# Altium PCB sensor_good.PcbDoc (part 2 of 3)
Units mil, origin at the board's own origin, x right, y up, seen from the top; angles counter-clockwise.
Board outline 3543.31 x 2755.91 mil, 6 copper layers (TOP, GND1, Sig1, Sig2, GND2, BOT), stack 32.112 mil thick; 126 components, 166 nets, 710 pads, 273 vias.
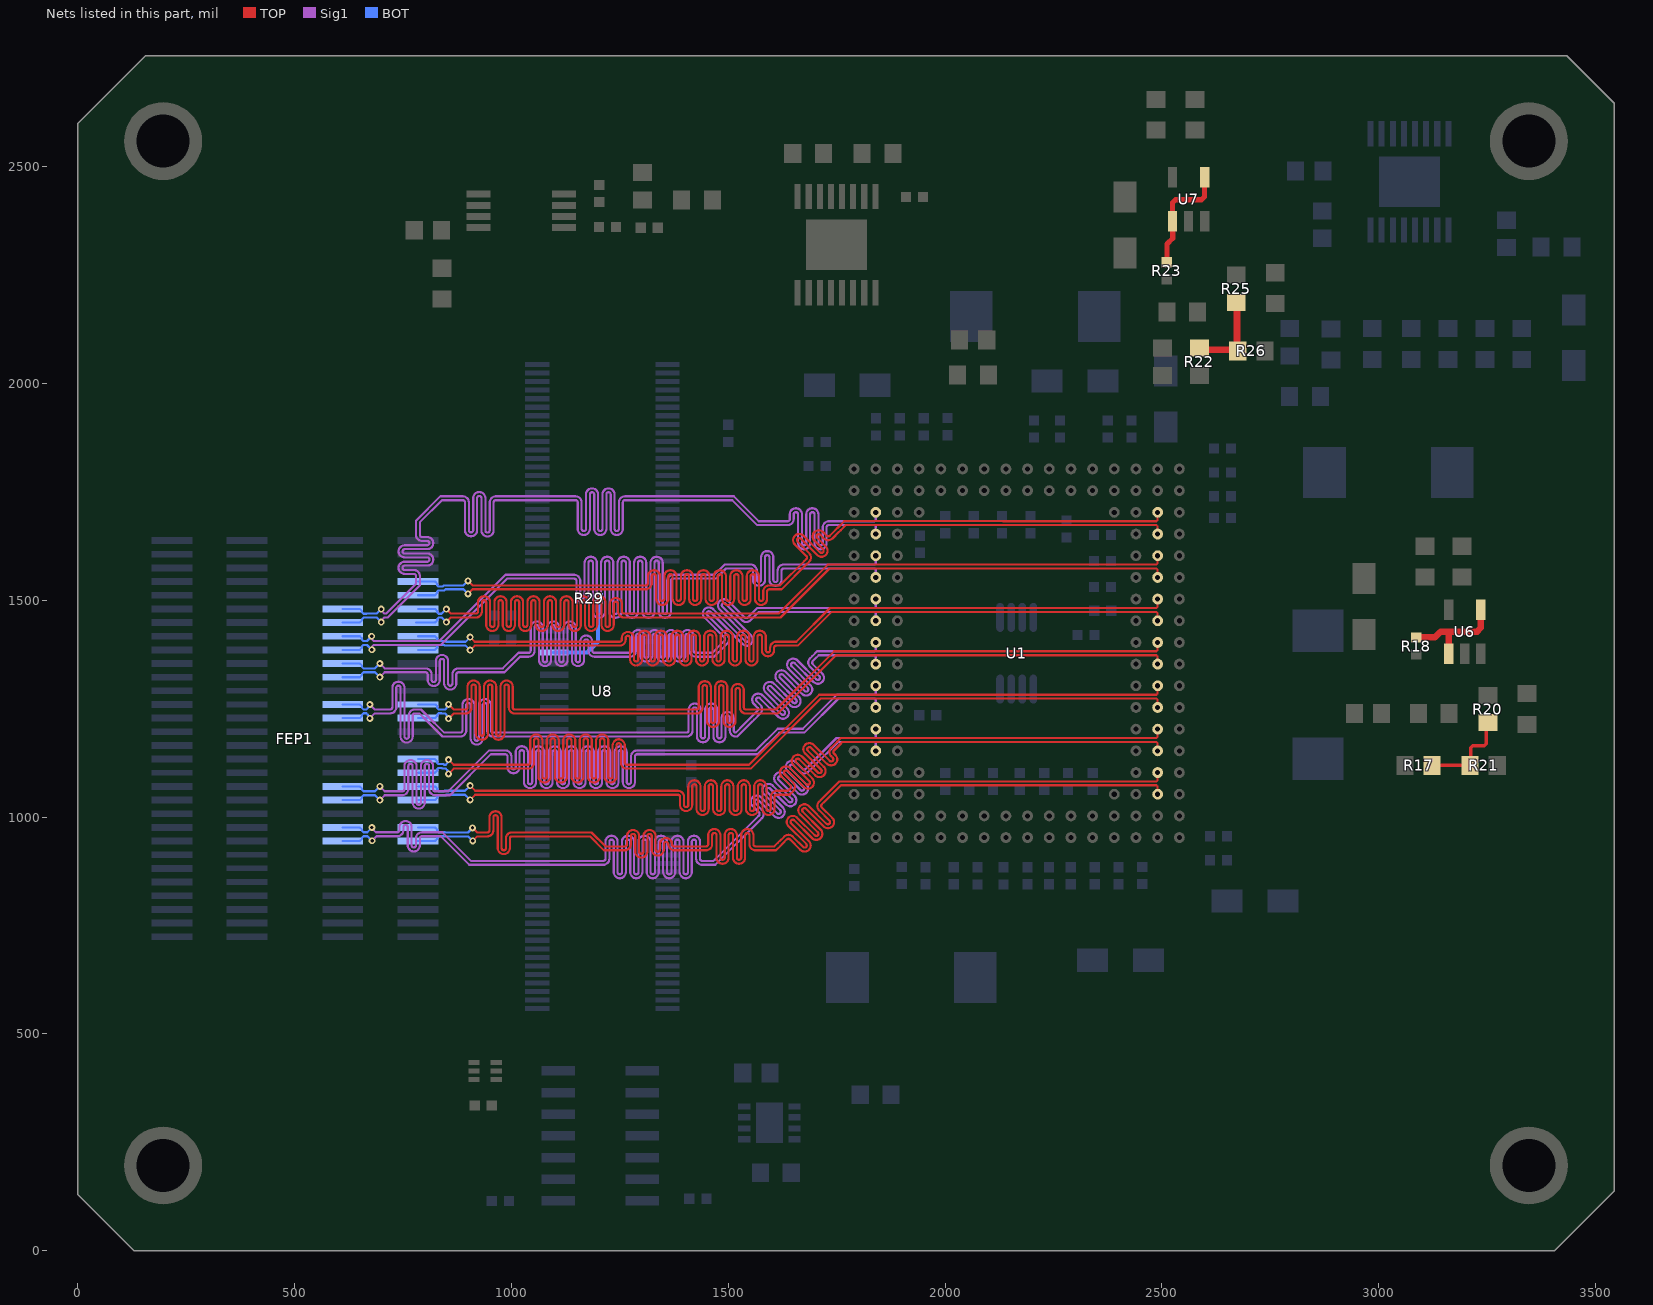
[diagram p6: the nets of this part, all layers, seen from the top]

## Via types
v1: diameter 16, hole 8, TOP to BOT, 215 vias
v2: diameter 20, hole 10, TOP to BOT, 40 vias
v3: diameter 30, hole 15, TOP to BOT, 8 vias
v4: diameter 50, hole 25, TOP to BOT, 5 vias
v5: diameter 19.7, hole 7.99, TOP to BOT, 2 vias
v6: diameter 19.7, hole 8, TOP to BOT, 2 vias
v7: diameter 22, hole 12, TOP to BOT, 1 vias

## Nets (pads, with @x,y where several pads share a name; then routed paths per layer and width w, separated by ;. In a path a pad name is that pad's centre, name@x,y a point inside that pad or via, vN(x,y) a via of type N, cw(c..) or ccw(c..) an arc to the next point about the centre after c; other vN are vias at no path point) (continued)
NetR17_1: R17.1 R20.1 R21.2 | length 218.6
  TOP w8: R17.1@3123.38,1119.37 R21.2@3210.39,1119.37 3211.89,1120.87 3211.89,1160.31 3216.58,1165 3243.73,1165 3248.41,1169.69 3248.41,1214.4 R20.1@3251.89,1217.88
NetR18_1: R18.1 U6.1 U6.4 | length 251.3
  TOP w15: R18.1@3086.89,1414.37 3129.28,1414.37 3142.67,1427.75 3161.89,1427.75 ; U6.1@3161.67,1376.75 3161.67,1427.53 3161.89,1427.75 ; U6.4@3235.67,1478.75 3235.67,1436.54 3226.88,1427.75 3161.89,1427.75
NetR22_1: R22.1 R25.1 R26.2 | length 202.2
  TOP w15: R22.1@2586.55,2081.49 2589.8,2078.25 2671.81,2078.25 R26.2@2673.3,2076.75 ; R25.1@2671.55,2187.01 2673.3,2185.26 R26.2@2673.3,2076.75 ; R26.2@2675.06,2075 R26.2@2673.3,2076.75
NetR23_1: R23.1 U7.1 U7.4 | length 267.8
  TOP w12: R23.1@2511.55,2279.69 2511.55,2321.55 2525,2335 2525,2373.55 U7.1@2524.55,2374 2524.55,2416.79 2531.58,2423.82 2591.52,2423.82 2598.55,2430.85 U7.4@2598.55,2476
NetR29_1: R29.1 U8.22 | length 211.4
  BOT w10: U8.22@1099,1379.57 1174.57,1379.57 1199.69,1404.69 R29.1@1199.69,1505
OUT0_BOT_N: FEP1.A26 U1.R15 | length 2848.3
  TOP w5: v1(900,1515) 910.5,1525.5 1302.81,1525.5 1309.81,1525.5 ccw(c1309.81,1539.5) 1323.81,1539.5 1323.81,1555.5 cw(c1328.81,1555.5) 1333.81,1555.5 1333.81,1503.5 ccw(c1347.81,1503.5) 1361.81,1503.5 1361.81,1555.5 cw(c1366.81,1555.5) 1371.81,1555.5 1371.81,1503.5 ccw(c1385.81,1503.5) 1399.81,1503.5 1399.81,1555.5 cw(c1404.81,1555.5) 1409.81,1555.5 1409.81,1503.5 ccw(c1423.81,1503.5) 1437.81,1503.5 1437.81,1555.5 cw(c1442.81,1555.5) 1447.81,1555.5 1447.81,1503.5 ccw(c1461.81,1503.5) 1475.81,1503.5 1475.81,1555.5 cw(c1480.81,1555.5) 1485.81,1555.5 1485.81,1503.5 ccw(c1499.81,1503.5) 1513.81,1503.5 1513.81,1555.5 cw(c1518.81,1555.5) 1523.81,1555.5 1523.81,1503.5 ccw(c1537.81,1503.5) 1551.81,1503.5 1551.81,1555.5 cw(c1556.81,1555.5) 1561.81,1555.5 1561.81,1503.5 ccw(c1575.81,1503.5) 1589.81,1503.5 1589.81,1520.5 cw(c1594.81,1520.5) 1594.81,1525.5 1613,1525.5 1623.23,1525.5 1681.76,1584.03 1686.68,1588.95 ccw(c1676.81,1598.88) 1686.68,1608.8 1660.09,1635.39 cw(c1663.64,1638.92) 1660.08,1642.43 ; 1660.12,1642.47 cw(c1663.64,1638.92) 1667.17,1642.45 ; 1667.2,1642.43 1705.08,1604.55 ccw(c1715.01,1614.41) 1724.91,1604.51 ccw(c1715.01,1614.41) 1724.89,1624.33 1705.22,1644 ; 1705.2,1644.02 cw(c1708.73,1647.56) 1705.18,1651.08 ; 1705.22,1651.12 cw(c1708.73,1647.56) 1712.27,1651.1 ; 1712.29,1651.07 1720.62,1642.75 ccw(c1730.55,1652.62) 1740.47,1642.74 1754.44,1656.71 ; 1754.47,1656.74 1759.4,1661.67 1771.36,1673.64 2129.68,1673.64 2129.86,1673.45 2487.43,1673.45 2490.35,1670.52 U1.R15@2490.35,1652.95
  BOT w5: FEP1.A26@784.41,1511.81 823.78,1511.81 829.15,1517.19 829.15,1520.13 832.08,1523.06 845.48,1523.06 847.93,1525.5 889.5,1525.5 v1(900,1515)
OUT0_BOT_P: FEP1.A27 U1.R16 | length 2848.3
  TOP w5: v1(900,1545) 910.5,1534.5 1302.81,1534.5 1309.81,1534.5 ccw(c1309.81,1539.5) 1314.81,1539.5 1314.81,1555.5 cw(c1328.81,1555.5) 1342.81,1555.5 1342.81,1503.5 ccw(c1347.81,1503.5) 1352.81,1503.5 1352.81,1555.5 cw(c1366.81,1555.5) 1380.81,1555.5 1380.81,1503.5 ccw(c1385.81,1503.5) 1390.81,1503.5 1390.81,1555.5 cw(c1404.81,1555.5) 1418.81,1555.5 1418.81,1503.5 ccw(c1423.81,1503.5) 1428.81,1503.5 1428.81,1555.5 cw(c1442.81,1555.5) 1456.81,1555.5 1456.81,1503.5 ccw(c1461.81,1503.5) 1466.81,1503.5 1466.81,1555.5 cw(c1480.81,1555.5) 1494.81,1555.5 1494.81,1503.5 ccw(c1499.81,1503.5) 1504.81,1503.5 1504.81,1555.5 cw(c1518.81,1555.5) 1532.81,1555.5 1532.81,1503.5 ccw(c1537.81,1503.5) 1542.81,1503.5 1542.81,1555.5 cw(c1556.81,1555.5) 1570.81,1555.5 1570.81,1503.5 ccw(c1575.81,1503.5) 1580.81,1503.5 1580.81,1520.5 cw(c1594.81,1520.5) 1594.81,1534.5 1613,1534.5 1619.5,1534.5 1675.39,1590.39 1680.32,1595.32 ; 1673.55,1648.8 ccw(c1663.64,1638.92) 1653.74,1648.82 ccw(c1663.64,1638.92) 1653.77,1628.98 1680.32,1602.44 cw(c1676.81,1598.88) 1680.35,1595.35 ; 1673.56,1648.79 1711.49,1610.87 ccw(c1715.01,1614.41) 1718.53,1610.86 ; 1718.57,1610.9 ccw(c1715.01,1614.41) 1718.55,1617.95 1698.83,1637.66 cw(c1708.73,1647.56) 1698.83,1657.46 cw(c1708.73,1647.56) 1718.65,1657.44 ; 1718.66,1657.43 1726.99,1649.1 ccw(c1730.55,1652.62) 1734.1,1649.1 ; 1734.11,1649.11 1748.08,1663.07 ; 1748.1,1663.1 1753.04,1668.04 1767.64,1682.64 2133.4,1682.64 2133.59,1682.45 2487.43,1682.45 2490.35,1685.38 U1.R16@2490.35,1702.95
  BOT w5: FEP1.A27@784.41,1543.31 823.78,1543.31 829.15,1537.93 829.15,1534.99 832.08,1532.06 841.76,1532.06 844.2,1534.5 889.5,1534.5 v1(900,1545)
OUT0_TOP_N: FEP1.B24 U1.B15 | length 2857.4
  Sig1 w5: v1(700,1450) 700,1452.98 704.35,1457.33 704.35,1457.57 707.28,1460.5 715.15,1460.5 789,1534.35 789,1549.04 789,1556.04 ccw(c775,1556.04) 775,1570.04 754,1570.04 cw(c754,1575.04) 754,1580.04 806,1580.04 ccw(c806,1594.04) 806,1608.04 754,1608.04 cw(c754,1613.04) 754,1618.04 806,1618.04 ccw(c806,1632.04) 806,1646.04 794,1646.04 cw(c794,1651.04) 789,1651.04 789,1676.22 789,1680 840,1731 866,1731 888,1731 cw(c888,1726) 893,1726 893,1661.72 ccw(c907,1661.72) 921,1661.72 921,1735.8 cw(c926,1735.8) 931,1735.8 931,1661.29 ccw(c945,1661.29) 959,1661.29 959,1726 cw(c964,1726) 964,1731 971,1731 1106.87,1731 1148,1731 cw(c1148,1726) 1153,1726 1153,1664.8 ccw(c1167,1664.8) 1181,1664.8 1181,1744.27 cw(c1186,1744.27) 1191,1744.27 1191,1664.8 ccw(c1205,1664.8) 1219,1664.8 1219,1744.27 cw(c1224,1744.27) 1229,1744.27 1229,1664.8 ccw(c1243,1664.8) 1257,1664.8 1257,1726 cw(c1262,1726) 1262,1731 1269,1731 1509.23,1731 1566.77,1673.45 1630,1673.45 1637,1673.45 ccw(c1637,1687.45) 1651,1687.45 1651,1698.45 cw(c1656,1698.45) 1661,1698.45 1661,1631.89 ccw(c1675,1631.89) 1689,1631.89 1689,1698.45 cw(c1694,1698.45) 1699,1698.45 1699,1631.89 ccw(c1713,1631.89) 1727,1631.89 1727,1668.45 cw(c1732,1668.45) 1732,1673.45 1765,1673.45 1837.43,1673.45 1840.35,1670.52 U1.B15@1840.35,1652.95
  BOT w5: FEP1.B24@611.18,1448.82 650.55,1448.82 655.93,1454.19 655.93,1457.14 658.85,1460.07 669.39,1460.07 669.82,1460.5 689.5,1460.5 v1(700,1450)
OUT0_TOP_P: FEP1.B25 U1.B16 | length 2857.4
  Sig1 w5: v1(700,1480) 700,1477.02 704.35,1472.67 704.35,1472.43 707.28,1469.5 711.42,1469.5 780,1538.08 780,1549.04 780,1556.04 ccw(c775,1556.04) 775,1561.04 754,1561.04 cw(c754,1575.04) 754,1589.04 806,1589.04 ccw(c806,1594.04) 806,1599.04 754,1599.04 cw(c754,1613.04) 754,1627.04 806,1627.04 ccw(c806,1632.04) 806,1637.04 794,1637.04 cw(c794,1651.04) 780,1651.04 780,1676.22 780,1683.73 836.27,1740 866,1740 888,1740 cw(c888,1726) 902,1726 902,1661.72 ccw(c907,1661.72) 912,1661.72 912,1735.8 cw(c926,1735.8) 940,1735.8 940,1661.29 ccw(c945,1661.29) 950,1661.29 950,1726 cw(c964,1726) 964,1740 971,1740 1106.87,1740 1148,1740 cw(c1148,1726) 1162,1726 1162,1664.8 ccw(c1167,1664.8) 1172,1664.8 1172,1744.27 cw(c1186,1744.27) 1200,1744.27 1200,1664.8 ccw(c1205,1664.8) 1210,1664.8 1210,1744.27 cw(c1224,1744.27) 1238,1744.27 1238,1664.8 ccw(c1243,1664.8) 1248,1664.8 1248,1726 cw(c1262,1726) 1262,1740 1269,1740 1512.95,1740 1570.5,1682.45 1630,1682.45 1637,1682.45 ccw(c1637,1687.45) 1642,1687.45 1642,1698.45 cw(c1656,1698.45) 1670,1698.45 1670,1631.89 ccw(c1675,1631.89) 1680,1631.89 1680,1698.45 cw(c1694,1698.45) 1708,1698.45 1708,1631.89 ccw(c1713,1631.89) 1718,1631.89 1718,1668.45 cw(c1732,1668.45) 1732,1682.45 1765,1682.45 1837.43,1682.45 1840.35,1685.38 U1.B16@1840.35,1702.95
  BOT w5: FEP1.B25@611.18,1480.32 650.55,1480.32 655.93,1474.94 655.93,1472 658.85,1469.07 665.66,1469.07 666.09,1469.5 689.5,1469.5 v1(700,1480)
OUT1_BOT_N: FEP1.A24 U1.R13 | length 2851.7
  TOP w5: v1(850,1450) 860.5,1460.5 911,1460.5 918,1460.5 ccw(c918,1474.5) 932,1474.5 932,1495.5 cw(c937,1495.5) 942,1495.5 942,1443.5 ccw(c956,1443.5) 970,1443.5 970,1495.5 cw(c975,1495.5) 980,1495.5 980,1443.5 ccw(c994,1443.5) 1008,1443.5 1008,1495.5 cw(c1013,1495.5) 1018,1495.5 1018,1443.5 ccw(c1032,1443.5) 1046,1443.5 1046,1495.5 cw(c1051,1495.5) 1056,1495.5 1056,1443.5 ccw(c1070,1443.5) 1084,1443.5 1084,1495.5 cw(c1089,1495.5) 1094,1495.5 1094,1443.5 ccw(c1108,1443.5) 1122,1443.5 1122,1495.5 cw(c1127,1495.5) 1132,1495.5 1132,1443.5 ccw(c1146,1443.5) 1160,1443.5 1160,1495.5 cw(c1165,1495.5) 1170,1495.5 1170,1443.5 ccw(c1184,1443.5) 1198,1443.5 1198,1495.5 cw(c1203,1495.5) 1208,1495.5 1208,1443.5 ccw(c1222,1443.5) 1236,1443.5 1236,1491.67 cw(c1241,1491.67) 1246,1491.67 1246,1474.5 ccw(c1260,1474.5) 1260,1460.5 1300.71,1460.5 1620.5,1460.5 1733.45,1573.45 2487.43,1573.45 2490.35,1570.52 U1.R13@2490.35,1552.95
  BOT w5: FEP1.A24@780.68,1448.82 FEP1.A24@784.41,1448.82 823.78,1448.82 829.15,1454.19 829.15,1457.14 832.08,1460.07 839.93,1460.07 v1(850,1450)
OUT1_BOT_P: FEP1.A25 U1.R14 | length 2848.3
  TOP w5: v1(850,1480) 860.5,1469.5 911,1469.5 918,1469.5 ccw(c918,1474.5) 923,1474.5 923,1495.5 cw(c937,1495.5) 951,1495.5 951,1443.5 ccw(c956,1443.5) 961,1443.5 961,1495.5 cw(c975,1495.5) 989,1495.5 989,1443.5 ccw(c994,1443.5) 999,1443.5 999,1495.5 cw(c1013,1495.5) 1027,1495.5 1027,1443.5 ccw(c1032,1443.5) 1037,1443.5 1037,1495.5 cw(c1051,1495.5) 1065,1495.5 1065,1443.5 ccw(c1070,1443.5) 1075,1443.5 1075,1495.5 cw(c1089,1495.5) 1103,1495.5 1103,1443.5 ccw(c1108,1443.5) 1113,1443.5 1113,1495.5 cw(c1127,1495.5) 1141,1495.5 1141,1443.5 ccw(c1146,1443.5) 1151,1443.5 1151,1495.5 cw(c1165,1495.5) 1179,1495.5 1179,1443.5 ccw(c1184,1443.5) 1189,1443.5 1189,1495.5 cw(c1203,1495.5) 1217,1495.5 1217,1443.5 ccw(c1222,1443.5) 1227,1443.5 1227,1491.67 cw(c1241,1491.67) 1255,1491.67 1255,1474.5 ccw(c1260,1474.5) 1260,1469.5 1300.71,1469.5 1616.77,1469.5 1729.72,1582.45 2487.43,1582.45 2490.35,1585.38 U1.R14@2490.35,1602.95
  BOT w5: FEP1.A25@784.41,1480.32 823.78,1480.32 829.15,1474.94 829.15,1472 832.08,1469.07 839.07,1469.07 v1(850,1480)
OUT1_TOP_N: FEP1.B22 U1.B13 | length 2858.7
  Sig1 w5: v1(678.39,1386.14) 678.39,1392.8 682.67,1397.07 837.07,1397.07 990,1550 1120,1550 1145,1550 cw(c1145,1545) 1150,1545 1150,1510.4 ccw(c1164,1510.4) 1178,1510.4 1178,1586.65 cw(c1183,1586.65) 1188,1586.65 1188,1473.7 ccw(c1202,1473.7) 1216,1473.7 1216,1586.65 cw(c1221,1586.65) 1226,1586.65 1226,1473.7 ccw(c1240,1473.7) 1254,1473.7 1254,1586.65 cw(c1259,1586.65) 1264,1586.65 1264,1473.7 ccw(c1278,1473.7) 1292,1473.7 1292,1586.65 cw(c1297,1586.65) 1302,1586.65 1302,1473.7 ccw(c1316,1473.7) 1330,1473.7 1330,1586.65 cw(c1335,1586.65) 1340,1586.65 1340,1473.7 ccw(c1354,1473.7) 1368,1473.7 1368,1545 cw(c1373,1545) 1373,1550 1380,1550 1471.55,1550 1495,1573.45 1530,1573.45 1552,1573.45 cw(c1552,1568.45) 1557,1568.45 1557,1547.45 ccw(c1571,1547.45) 1585,1547.45 1585,1599.45 cw(c1590,1599.45) 1595,1599.45 1595,1547.45 ccw(c1609,1547.45) 1623,1547.45 1623,1568.45 cw(c1628,1568.45) 1628,1573.45 1635,1573.45 1837.43,1573.45 1840.35,1570.52 U1.B13@1840.35,1552.95
  BOT w5: FEP1.B22@611.18,1385.83 650.55,1385.83 655.93,1391.2 655.93,1394.15 658.85,1397.07 667.15,1397.07 678.09,1386.14 v1(678.39,1386.14)
OUT1_TOP_P: FEP1.B23 U1.B14 | length 2858.8
  Sig1 w5: v1(677.78,1417.25) 677.78,1410.97 682.67,1406.07 833.35,1406.07 986.27,1559 1120,1559 1145,1559 cw(c1145,1545) 1159,1545 1159,1510.4 ccw(c1164,1510.4) 1169,1510.4 1169,1586.65 cw(c1183,1586.65) 1197,1586.65 1197,1473.7 ccw(c1202,1473.7) 1207,1473.7 1207,1586.65 cw(c1221,1586.65) 1235,1586.65 1235,1473.7 ccw(c1240,1473.7) 1245,1473.7 1245,1586.65 cw(c1259,1586.65) 1273,1586.65 1273,1473.7 ccw(c1278,1473.7) 1283,1473.7 1283,1586.65 cw(c1297,1586.65) 1311,1586.65 1311,1473.7 ccw(c1316,1473.7) 1321,1473.7 1321,1586.65 cw(c1335,1586.65) 1349,1586.65 1349,1473.7 ccw(c1354,1473.7) 1359,1473.7 1359,1545 cw(c1373,1545) 1373,1559 1380,1559 1467.82,1559 1491.27,1582.45 1530,1582.45 1552,1582.45 cw(c1552,1568.45) 1566,1568.45 1566,1547.45 ccw(c1571,1547.45) 1576,1547.45 1576,1599.45 cw(c1590,1599.45) 1604,1599.45 1604,1547.45 ccw(c1609,1547.45) 1614,1547.45 1614,1568.45 cw(c1628,1568.45) 1628,1582.45 1635,1582.45 1837.43,1582.45 1840.35,1585.38 U1.B14@1840.35,1602.95
  BOT w5: FEP1.B23@611.18,1417.32 650.55,1417.32 655.93,1411.95 655.93,1409 658.85,1406.07 666.91,1406.07 677.78,1416.94 v1(677.78,1417.25)
OUT2_BOT_N: FEP1.A22 U1.R11 | length 2848.3
  TOP w5: v1(905,1385) 915.5,1395.5 1242.67,1395.5 1249.67,1395.5 ccw(c1249.67,1409.5) 1263.67,1409.5 1263.67,1413.27 cw(c1268.67,1413.27) 1273.67,1413.27 1273.67,1364 ccw(c1287.67,1364) 1301.67,1364 1301.67,1416 cw(c1306.67,1416) 1311.67,1416 1311.67,1364 ccw(c1325.67,1364) 1339.67,1364 1339.67,1416 cw(c1344.67,1416) 1349.67,1416 1349.67,1364 ccw(c1363.67,1364) 1377.67,1364 1377.67,1416 cw(c1382.67,1416) 1387.67,1416 1387.67,1364 ccw(c1401.67,1364) 1415.67,1364 1415.67,1416 cw(c1420.67,1416) 1425.67,1416 1425.67,1364 ccw(c1439.67,1364) 1453.67,1364 1453.67,1416 cw(c1458.67,1416) 1463.67,1416 1463.67,1364 ccw(c1477.67,1364) 1491.67,1364 1491.67,1416 cw(c1496.67,1416) 1501.67,1416 1501.67,1364 ccw(c1515.67,1364) 1529.67,1364 1529.67,1416 cw(c1534.67,1416) 1539.67,1416 1539.67,1364 ccw(c1553.67,1364) 1567.67,1364 1567.67,1416 cw(c1572.67,1416) 1577.67,1416 1577.67,1385.02 ccw(c1591.67,1385.02) 1605.67,1385.02 1605.67,1390.5 cw(c1610.67,1390.5) 1610.67,1395.5 1633.72,1395.5 1660.5,1395.5 1738.45,1473.45 2487.43,1473.45 2490.35,1470.52 U1.R11@2490.35,1452.95
  BOT w5: FEP1.A22@784.41,1385.83 823.78,1385.83 829.15,1391.2 829.15,1394.15 832.08,1397.07 844.69,1397.07 846.26,1395.5 894.5,1395.5 v1(905,1385)
OUT2_BOT_P: FEP1.A23 U1.R12 | length 2848.3
  TOP w5: v1(905,1415) 915.5,1404.5 1242.67,1404.5 1249.67,1404.5 ccw(c1249.67,1409.5) 1254.67,1409.5 1254.67,1413.27 cw(c1268.67,1413.27) 1282.67,1413.27 1282.67,1364 ccw(c1287.67,1364) 1292.67,1364 1292.67,1416 cw(c1306.67,1416) 1320.67,1416 1320.67,1364 ccw(c1325.67,1364) 1330.67,1364 1330.67,1416 cw(c1344.67,1416) 1358.67,1416 1358.67,1364 ccw(c1363.67,1364) 1368.67,1364 1368.67,1416 cw(c1382.67,1416) 1396.67,1416 1396.67,1364 ccw(c1401.67,1364) 1406.67,1364 1406.67,1416 cw(c1420.67,1416) 1434.67,1416 1434.67,1364 ccw(c1439.67,1364) 1444.67,1364 1444.67,1416 cw(c1458.67,1416) 1472.67,1416 1472.67,1364 ccw(c1477.67,1364) 1482.67,1364 1482.67,1416 cw(c1496.67,1416) 1510.67,1416 1510.67,1364 ccw(c1515.67,1364) 1520.67,1364 1520.67,1416 cw(c1534.67,1416) 1548.67,1416 1548.67,1364 ccw(c1553.67,1364) 1558.67,1364 1558.67,1416 cw(c1572.67,1416) 1586.67,1416 1586.67,1385.02 ccw(c1591.67,1385.02) 1596.67,1385.02 1596.67,1390.5 cw(c1610.67,1390.5) 1610.67,1404.5 1633.72,1404.5 1656.77,1404.5 1734.72,1482.45 2487.43,1482.45 2490.35,1485.38 U1.R12@2490.35,1502.95
  BOT w5: FEP1.A23@784.41,1417.32 823.78,1417.32 829.15,1411.95 829.15,1409 832.08,1406.07 848.42,1406.07 849.99,1404.5 894.5,1404.5 v1(905,1415)
OUT2_TOP_N: FEP1.B20 U1.B11 | length 2856.7
  Sig1 w5: v1(696.67,1322.83) 707.92,1334.08 765,1334.08 802,1334.08 cw(c802,1329.08) 807,1329.08 807,1316.62 ccw(c821,1316.62) 835,1316.62 835,1360.08 cw(c840,1360.08) 845,1360.08 845,1308.08 ccw(c859,1308.08) 873,1308.08 873,1329.08 cw(c878,1329.08) 878,1334.08 885,1334.08 984.08,1334.08 1020,1370 1032.5,1370 1039.5,1370 ccw(c1039.5,1384) 1053.5,1384 1053.5,1437.57 cw(c1058.5,1437.57) 1063.5,1437.57 1063.5,1362.28 ccw(c1077.5,1362.28) 1091.5,1362.28 1091.5,1437.57 cw(c1096.5,1437.57) 1101.5,1437.57 1101.5,1362.28 ccw(c1115.5,1362.28) 1129.5,1362.28 1129.5,1437.57 cw(c1134.5,1437.57) 1139.5,1437.57 1139.5,1362.28 ccw(c1153.5,1362.28) 1167.5,1362.28 1167.5,1404.91 cw(c1172.5,1404.91) 1177.5,1404.91 1177.5,1384 ccw(c1191.5,1384) 1191.5,1370 1231.5,1370 1266.13,1370 1273.13,1370 ccw(c1273.13,1384) 1287.13,1384 1287.13,1417.45 cw(c1292.13,1417.45) 1297.13,1417.45 1297.13,1372.59 ccw(c1311.13,1372.59) 1325.13,1372.59 1325.13,1417.45 cw(c1330.13,1417.45) 1335.13,1417.45 1335.13,1372.59 ccw(c1349.13,1372.59) 1363.13,1372.59 1363.13,1417.45 cw(c1368.13,1417.45) 1373.13,1417.45 1373.13,1372.59 ccw(c1387.13,1372.59) 1401.13,1372.59 1401.13,1417.45 cw(c1406.13,1417.45) 1411.13,1417.45 1411.13,1384 ccw(c1425.13,1384) 1425.13,1370 1443.9,1370 1467.39,1370 1492.91,1395.52 1497.84,1400.44 ccw(c1487.96,1410.37) 1497.84,1420.29 1451.94,1466.19 cw(c1455.48,1469.72) 1451.93,1473.24 ; 1451.96,1473.27 cw(c1455.48,1469.72) 1459.02,1473.26 ; 1459.04,1473.23 1532.83,1399.44 ccw(c1542.77,1409.3) 1552.67,1399.4 ccw(c1542.77,1409.3) 1552.65,1419.22 1486.72,1485.15 ; 1486.71,1485.16 cw(c1490.23,1488.71) 1486.68,1492.23 ; 1486.71,1492.26 cw(c1490.23,1488.71) 1493.77,1492.24 ; 1493.79,1492.22 1531.77,1454.24 ccw(c1541.7,1464.11) 1551.63,1454.23 1567.16,1469.77 ; 1567.19,1469.8 1570.85,1473.45 1573.41,1473.45 1837.43,1473.45 1840.35,1470.52 U1.B11@1840.35,1452.95
  BOT w5: FEP1.B20@611.18,1322.83 650.55,1322.83 655.93,1328.21 655.93,1331.15 658.85,1334.08 685.42,1334.08 v1(696.67,1322.83)
OUT2_TOP_P: FEP1.B21 U1.B12 | length 2856.9
  Sig1 w5: v1(696.67,1354.33) 707.92,1343.08 765,1343.08 802,1343.08 cw(c802,1329.08) 816,1329.08 816,1316.62 ccw(c821,1316.62) 826,1316.62 826,1360.08 cw(c840,1360.08) 854,1360.08 854,1308.08 ccw(c859,1308.08) 864,1308.08 864,1329.08 cw(c878,1329.08) 878,1343.08 885,1343.08 980.35,1343.08 1016.27,1379 1032.5,1379 1039.5,1379 ccw(c1039.5,1384) 1044.5,1384 1044.5,1437.57 cw(c1058.5,1437.57) 1072.5,1437.57 1072.5,1362.28 ccw(c1077.5,1362.28) 1082.5,1362.28 1082.5,1437.57 cw(c1096.5,1437.57) 1110.5,1437.57 1110.5,1362.28 ccw(c1115.5,1362.28) 1120.5,1362.28 1120.5,1437.57 cw(c1134.5,1437.57) 1148.5,1437.57 1148.5,1362.28 ccw(c1153.5,1362.28) 1158.5,1362.28 1158.5,1404.91 cw(c1172.5,1404.91) 1186.5,1404.91 1186.5,1384 ccw(c1191.5,1384) 1191.5,1379 1231.5,1379 1266.13,1379 1273.13,1379 ccw(c1273.13,1384) 1278.13,1384 1278.13,1417.45 cw(c1292.13,1417.45) 1306.13,1417.45 1306.13,1372.59 ccw(c1311.13,1372.59) 1316.13,1372.59 1316.13,1417.45 cw(c1330.13,1417.45) 1344.13,1417.45 1344.13,1372.59 ccw(c1349.13,1372.59) 1354.13,1372.59 1354.13,1417.45 cw(c1368.13,1417.45) 1382.13,1417.45 1382.13,1372.59 ccw(c1387.13,1372.59) 1392.13,1372.59 1392.13,1417.45 cw(c1406.13,1417.45) 1420.13,1417.45 1420.13,1384 ccw(c1425.13,1384) 1425.13,1379 1443.9,1379 1463.67,1379 1486.55,1401.88 1491.47,1406.81 ccw(c1487.96,1410.37) 1491.48,1413.92 1445.62,1459.79 cw(c1455.48,1469.72) 1444.26,1478.1 1444.26,1478.3 1446.9,1480.94 1447.1,1480.94 cw(c1455.48,1469.72) 1465.4,1479.6 1539.24,1405.76 ccw(c1542.77,1409.3) 1546.29,1405.75 ; 1500.15,1498.59 ccw(c1490.23,1488.71) 1481.86,1499.92 1481.65,1499.92 1479.02,1497.29 1479.02,1497.08 ccw(c1490.23,1488.71) 1480.33,1478.81 1546.28,1412.86 ; 1500.16,1498.58 1538.15,1460.59 ; 1538.15,1460.59 ccw(c1541.7,1464.11) 1545.26,1460.59 ; 1545.26,1460.6 1560.8,1476.13 ; 1546.31,1412.84 cw(c1542.77,1409.3) 1546.33,1405.78 ; 1560.83,1476.16 1565.76,1481.1 1567.12,1482.45 1837.43,1482.45 1840.35,1485.38 U1.B12@1840.35,1502.95
  BOT w5: FEP1.B21@611.18,1354.33 650.55,1354.33 655.93,1348.96 655.93,1346.01 658.85,1343.08 685.42,1343.08 v1(696.67,1354.33)
OUT3_BOT_N: FEP1.A17 U1.R9 | length 2848.2
  TOP w5: v1(854.98,1227.29) 866.85,1239.15 887,1239.15 894,1239.15 ccw(c894,1253.15) 908,1253.15 908,1300.96 cw(c913,1300.96) 918,1300.96 918,1192.61 ccw(c932,1192.61) 946,1192.61 946,1300.96 cw(c951,1300.96) 956,1300.96 956,1192.61 ccw(c970,1192.61) 984,1192.61 984,1300.96 cw(c989,1300.96) 994,1300.96 994,1253.15 ccw(c1008,1253.15) 1008,1239.15 1026.6,1239.15 1420,1239.15 1427,1239.15 ccw(c1427,1253.15) 1441,1253.15 1441,1299.63 cw(c1446,1299.63) 1451,1299.63 1451,1222.15 ccw(c1465,1222.15) 1479,1222.15 1479,1299.63 cw(c1484,1299.63) 1489,1299.63 1489,1222.15 ccw(c1503,1222.15) 1517,1222.15 1517,1293.12 cw(c1522,1293.12) 1527,1293.12 1527,1253.15 ccw(c1541,1253.15) 1541,1239.15 1584.65,1239.15 1614.15,1239.15 1748.45,1373.45 2487.43,1373.45 2490.35,1370.52 U1.R9@2490.35,1352.95
  BOT w5: FEP1.A17@784.41,1228.35 823.78,1228.35 829.15,1233.72 829.15,1236.67 832.08,1239.59 838.89,1239.59 839.34,1239.15 847.21,1239.15 850.13,1236.22 850.13,1235.12 854.98,1230.27 v1(854.98,1227.29)
OUT3_BOT_P: FEP1.A18 U1.R10 | length 2849
  TOP w5: v1(855,1260) 866.85,1248.15 887,1248.15 894,1248.15 ccw(c894,1253.15) 899,1253.15 899,1300.96 cw(c913,1300.96) 927,1300.96 927,1192.61 ccw(c932,1192.61) 937,1192.61 937,1300.96 cw(c951,1300.96) 965,1300.96 965,1192.61 ccw(c970,1192.61) 975,1192.61 975,1300.96 cw(c989,1300.96) 1003,1300.96 1003,1253.15 ccw(c1008,1253.15) 1008,1248.15 1026.6,1248.15 1420,1248.15 1427,1248.15 ccw(c1427,1253.15) 1432,1253.15 1432,1299.63 cw(c1446,1299.63) 1460,1299.63 1460,1222.15 ccw(c1465,1222.15) 1470,1222.15 1470,1299.63 cw(c1484,1299.63) 1498,1299.63 1498,1222.15 ccw(c1503,1222.15) 1508,1222.15 1508,1293.12 cw(c1522,1293.12) 1536,1293.12 1536,1253.15 ccw(c1541,1253.15) 1541,1248.15 1584.65,1248.15 1610.42,1248.15 1744.72,1382.45 2487.43,1382.45 2490.35,1385.38 U1.R10@2490.35,1402.95
  BOT w5: FEP1.A18@784.41,1259.84 824.98,1259.84 828.98,1255.84 828.98,1251.52 831.91,1248.59 842.61,1248.59 843.06,1248.15 847.21,1248.15 850.13,1251.07 850.13,1252.16 855,1257.02 v1(855,1260)
OUT3_TOP_N: FEP1.B17 U1.B9 | length 2857.4
  Sig1 w5: v1(673.69,1227.86) 685.19,1239.35 713.51,1239.35 720.51,1239.35 ccw(c720.51,1253.35) 734.51,1253.35 734.51,1298.33 cw(c739.51,1298.33) 744.51,1298.33 744.51,1185.93 ccw(c758.51,1185.93) 772.51,1185.93 772.51,1234.35 cw(c777.51,1234.35) 777.51,1239.35 787.92,1239.35 803.32,1223.95 841.27,1186 875,1186 882,1186 ccw(c882,1200) 896,1200 896,1258.27 cw(c901,1258.27) 906,1258.27 906,1181.24 ccw(c920,1181.24) 934,1181.24 934,1258.27 cw(c939,1258.27) 944,1258.27 944,1200 ccw(c958,1200) 958,1186 980,1186 1358.76,1186 1403.76,1186 ccw(c1403.76,1200) 1417.76,1200 1417.76,1248.1 cw(c1422.76,1248.1) 1427.76,1248.1 1427.76,1186.68 ccw(c1441.76,1186.68) 1455.76,1186.68 1455.76,1248.1 cw(c1460.76,1248.1) 1465.76,1248.1 1465.76,1186.68 ccw(c1479.76,1186.68) 1493.76,1186.68 1493.76,1228.92 cw(c1498.76,1228.92) 1503.76,1228.92 1503.76,1200 ccw(c1517.76,1200) 1517.76,1186 1521,1186 1534.92,1199.92 1555,1220 1559.94,1224.94 ; 1559.96,1224.96 1574.11,1239.11 ccw(c1564.24,1249.03) 1574.11,1258.96 1565.64,1267.43 cw(c1569.19,1270.96) 1565.64,1274.48 ; 1565.66,1274.51 cw(c1569.19,1270.96) 1572.72,1274.49 ; 1572.75,1274.47 1616.17,1231.04 ccw(c1626.11,1240.9) 1636.01,1231 ccw(c1626.11,1240.9) 1635.99,1250.82 1592.51,1294.3 cw(c1596.06,1297.82) 1592.51,1301.35 ; 1592.53,1301.37 cw(c1596.06,1297.83) 1599.59,1301.36 ; 1599.62,1301.34 1643.04,1257.91 ccw(c1652.98,1267.77) 1662.88,1257.87 ccw(c1652.98,1267.77) 1662.86,1277.69 ; 1619.38,1328.22 ccw(c1622.93,1324.69) 1619.38,1321.17 1662.85,1277.7 ; 1619.4,1328.24 cw(c1622.93,1324.69) 1626.46,1328.23 1669.91,1284.78 ccw(c1679.85,1294.64) 1689.75,1284.74 ccw(c1679.85,1294.64) 1689.73,1304.56 1646.25,1348.04 cw(c1649.8,1351.56) 1646.25,1355.09 ; 1646.27,1355.11 cw(c1649.8,1351.56) 1653.33,1355.1 ; 1653.36,1355.07 1696.78,1311.65 ccw(c1706.72,1321.51) 1716.62,1311.61 ccw(c1706.72,1321.51) 1716.6,1331.43 1695.07,1352.96 cw(c1698.59,1356.51) 1695.04,1360.04 ; 1695.08,1360.08 1700,1365 1708.45,1373.45 1837.43,1373.45 1840.35,1370.52 U1.B9@1840.35,1352.95
  BOT w5: FEP1.B17@611.18,1228.35 650.55,1228.35 655.93,1233.72 655.93,1236.67 658.85,1239.59 665.66,1239.59 668.83,1236.42 668.83,1235.7 673.69,1230.84 v1(673.69,1227.86)
OUT3_TOP_P: FEP1.B18 U1.B10 | length 2857.5
  Sig1 w5: v1(673.69,1259.84) 685.19,1248.35 713.51,1248.35 720.51,1248.35 ccw(c720.51,1253.35) 725.51,1253.35 725.51,1298.33 cw(c739.51,1298.33) 753.51,1298.33 753.51,1185.93 ccw(c758.51,1185.93) 763.51,1185.93 763.51,1234.35 cw(c777.51,1234.35) 777.51,1248.35 791.65,1248.35 803.32,1236.68 845,1195 875,1195 882,1195 ccw(c882,1200) 887,1200 887,1258.27 cw(c901,1258.27) 915,1258.27 915,1181.24 ccw(c920,1181.24) 925,1181.24 925,1258.27 cw(c939,1258.27) 953,1258.27 953,1200 ccw(c958,1200) 958,1195 980,1195 1358.76,1195 1403.76,1195 ccw(c1403.76,1200) 1408.76,1200 1408.76,1248.1 cw(c1422.76,1248.1) 1436.76,1248.1 1436.76,1186.68 ccw(c1441.76,1186.68) 1446.76,1186.68 1446.76,1248.1 cw(c1460.76,1248.1) 1474.76,1248.1 1474.76,1186.68 ccw(c1479.76,1186.68) 1484.76,1186.68 1484.76,1228.92 cw(c1498.76,1228.92) 1512.76,1228.92 1512.76,1200 ccw(c1517.76,1200) 1517.29,1195.02 1534.92,1212.65 1548.64,1226.36 1553.57,1231.3 1567.75,1245.47 ccw(c1564.24,1249.03) 1567.75,1252.59 ; 1567.75,1252.6 1559.32,1261.02 cw(c1569.19,1270.96) 1557.97,1279.33 1557.97,1279.54 1560.6,1282.17 1560.81,1282.17 cw(c1569.19,1270.96) 1579.1,1280.84 ; 1579.11,1280.83 1622.58,1237.36 ccw(c1626.11,1240.9) 1629.63,1237.35 ; 1586.19,1287.89 1629.62,1244.46 ; 1586.19,1287.89 cw(c1596.06,1297.82) 1584.84,1306.2 1584.84,1306.41 1587.47,1309.04 1587.68,1309.04 cw(c1596.06,1297.83) 1605.97,1307.71 1649.45,1264.23 ccw(c1652.98,1267.77) 1656.5,1264.22 ; 1629.64,1244.44 cw(c1626.11,1240.9) 1629.66,1237.39 ; 1656.49,1271.33 1613.06,1314.76 cw(c1622.93,1324.69) 1611.71,1333.07 1611.71,1333.28 1614.34,1335.91 1614.55,1335.91 cw(c1622.93,1324.69) 1632.84,1334.58 1676.32,1291.1 ccw(c1679.85,1294.64) 1683.36,1291.09 ; 1656.53,1264.26 ccw(c1652.98,1267.77) 1656.51,1271.31 ; 1659.72,1361.44 1703.19,1317.97 ccw(c1706.72,1321.51) 1710.23,1317.96 ; 1659.71,1361.45 ccw(c1649.8,1351.56) 1641.42,1362.78 1641.21,1362.78 1638.58,1360.15 1638.58,1359.94 ccw(c1649.8,1351.56) 1639.93,1341.63 1683.36,1298.2 ; 1683.4,1291.13 ccw(c1679.85,1294.64) 1683.38,1298.18 ; 1710.27,1317.99 ccw(c1706.72,1321.51) 1710.25,1325.05 1688.72,1346.59 cw(c1698.59,1356.51) 1688.71,1366.44 1693.64,1371.36 1704.72,1382.45 1837.43,1382.45 1840.35,1385.38 U1.B10@1840.35,1402.95
  BOT w5: FEP1.B18@611.18,1259.84 650.55,1259.84 655.93,1254.47 655.93,1251.52 658.85,1248.59 665.9,1248.59 668.83,1251.52 668.83,1252 673.69,1256.87 v1(673.69,1259.84)
OUT4_BOT_N: FEP1.A13 U1.R7 | length 2840.6
  TOP w5: v1(855,1100) 866.86,1111.86 1031.49,1111.86 1038.49,1111.86 ccw(c1038.49,1125.86) 1052.49,1125.86 1052.49,1176.84 cw(c1057.49,1176.84) 1062.49,1176.84 1062.49,1094.08 ccw(c1076.49,1094.08) 1090.49,1094.08 1090.49,1176.84 cw(c1095.49,1176.84) 1100.49,1176.84 1100.49,1094.08 ccw(c1114.49,1094.08) 1128.49,1094.08 1128.49,1176.84 cw(c1133.49,1176.84) 1138.49,1176.84 1138.49,1094.08 ccw(c1152.49,1094.08) 1166.49,1094.08 1166.49,1176.84 cw(c1171.49,1176.84) 1176.49,1176.84 1176.49,1094.08 ccw(c1190.49,1094.08) 1204.49,1094.08 1204.49,1176.84 cw(c1209.49,1176.84) 1214.49,1176.84 1214.49,1094.08 ccw(c1228.49,1094.08) 1242.49,1094.08 1242.49,1165.55 cw(c1247.49,1165.55) 1252.49,1165.55 1252.49,1125.86 ccw(c1266.49,1125.86) 1266.49,1111.86 1318,1111.86 1551.86,1111.86 1713.45,1273.45 2487.43,1273.45 2490.35,1270.52 U1.R7@2490.35,1252.95
  BOT w5: FEP1.A13@784.41,1102.36 823.78,1102.36 829.15,1107.74 829.15,1110.68 832.08,1113.61 838.89,1113.61 840.64,1111.86 848.51,1111.86 v1@852.9,1107.47
OUT4_BOT_P: FEP1.A14 U1.R8 | length 2840.6
  TOP w5: v1(855.02,1132.71) 866.86,1120.86 1031.49,1120.86 1038.49,1120.86 ccw(c1038.49,1125.86) 1043.49,1125.86 1043.49,1176.84 cw(c1057.49,1176.84) 1071.49,1176.84 1071.49,1094.08 ccw(c1076.49,1094.08) 1081.49,1094.08 1081.49,1176.84 cw(c1095.49,1176.84) 1109.49,1176.84 1109.49,1094.08 ccw(c1114.49,1094.08) 1119.49,1094.08 1119.49,1176.84 cw(c1133.49,1176.84) 1147.49,1176.84 1147.49,1094.08 ccw(c1152.49,1094.08) 1157.49,1094.08 1157.49,1176.84 cw(c1171.49,1176.84) 1185.49,1176.84 1185.49,1094.08 ccw(c1190.49,1094.08) 1195.49,1094.08 1195.49,1176.84 cw(c1209.49,1176.84) 1223.49,1176.84 1223.49,1094.08 ccw(c1228.49,1094.08) 1233.49,1094.08 1233.49,1165.55 cw(c1247.49,1165.55) 1261.49,1165.55 1261.49,1125.86 ccw(c1266.49,1125.86) 1266.49,1120.86 1318,1120.86 1548.13,1120.86 1709.72,1282.45 2487.43,1282.45 2490.35,1285.38 U1.R8@2490.35,1302.95
  BOT w5: FEP1.A14@784.41,1133.86 823.78,1133.86 829.15,1128.48 829.15,1125.54 832.08,1122.61 842.61,1122.61 844.37,1120.86 848.51,1120.86 v1@852.91,1125.25
OUT4_TOP_N: FEP1.B11 U1.B7 | length 2856.7
  Sig1 w5: v1(696.67,1039.37) 707.92,1050.62 741.34,1050.62 748.34,1050.62 ccw(c748.34,1064.62) 762.34,1064.62 762.34,1117.72 cw(c767.34,1117.72) 772.34,1117.72 772.34,1033.62 ccw(c786.34,1033.62) 800.34,1033.62 800.34,1117.72 cw(c805.34,1117.72) 810.34,1117.72 810.34,1064.62 ccw(c824.34,1064.62) 824.34,1050.62 847.55,1050.62 858.35,1050.62 952.73,1145 958.57,1145 986,1145 cw(c986,1140) 991,1140 991,1115.41 ccw(c1005,1115.41) 1019,1115.41 1019,1149.65 cw(c1024,1149.65) 1029,1149.65 1029,1081.07 ccw(c1043,1081.07) 1057,1081.07 1057,1149.65 cw(c1062,1149.65) 1067,1149.65 1067,1081.07 ccw(c1081,1081.07) 1095,1081.07 1095,1149.65 cw(c1100,1149.65) 1105,1149.65 1105,1081.07 ccw(c1119,1081.07) 1133,1081.07 1133,1149.65 cw(c1138,1149.65) 1143,1149.65 1143,1081.07 ccw(c1157,1081.07) 1171,1081.07 1171,1149.65 cw(c1176,1149.65) 1181,1149.65 1181,1081.07 ccw(c1195,1081.07) 1209,1081.07 1209,1149.65 cw(c1214,1149.65) 1219,1149.65 1219,1081.07 ccw(c1233,1081.07) 1247,1081.07 1247,1149.65 cw(c1252,1149.65) 1257,1149.65 1257,1081.07 ccw(c1271,1081.07) 1285,1081.07 1285,1140 cw(c1290,1140) 1290,1145 1297,1145 1567.73,1145 1617.73,1195 1675.61,1195 1754.25,1273.64 1779.68,1273.64 1779.86,1273.45 1837.43,1273.45 1840.35,1270.52 U1.B7@1840.35,1252.95
  BOT w5: FEP1.B11@611.18,1039.37 650.55,1039.37 655.93,1044.74 655.93,1047.69 658.85,1050.62 685.42,1050.62 v1(696.67,1039.37)
OUT4_TOP_P: FEP1.B12 U1.B8 | length 2856.7
  Sig1 w5: v1(696.67,1070.87) 707.92,1059.62 741.34,1059.62 748.34,1059.62 ccw(c748.34,1064.62) 753.34,1064.62 753.34,1117.72 cw(c767.34,1117.72) 781.34,1117.72 781.34,1033.62 ccw(c786.34,1033.62) 791.34,1033.62 791.34,1117.72 cw(c805.34,1117.72) 819.34,1117.72 819.34,1064.62 ccw(c824.34,1064.62) 824.34,1059.62 847.55,1059.62 854.62,1059.62 949,1154 958.57,1154 986,1154 cw(c986,1140) 1000,1140 1000,1115.41 ccw(c1005,1115.41) 1010,1115.41 1010,1149.65 cw(c1024,1149.65) 1038,1149.65 1038,1081.07 ccw(c1043,1081.07) 1048,1081.07 1048,1149.65 cw(c1062,1149.65) 1076,1149.65 1076,1081.07 ccw(c1081,1081.07) 1086,1081.07 1086,1149.65 cw(c1100,1149.65) 1114,1149.65 1114,1081.07 ccw(c1119,1081.07) 1124,1081.07 1124,1149.65 cw(c1138,1149.65) 1152,1149.65 1152,1081.07 ccw(c1157,1081.07) 1162,1081.07 1162,1149.65 cw(c1176,1149.65) 1190,1149.65 1190,1081.07 ccw(c1195,1081.07) 1200,1081.07 1200,1149.65 cw(c1214,1149.65) 1228,1149.65 1228,1081.07 ccw(c1233,1081.07) 1238,1081.07 1238,1149.65 cw(c1252,1149.65) 1266,1149.65 1266,1081.07 ccw(c1271,1081.07) 1276,1081.07 1276,1140 cw(c1290,1140) 1290,1154 1297,1154 1564,1154 1614,1204 1671.88,1204 1750.52,1282.64 1783.4,1282.64 1783.59,1282.45 1837.43,1282.45 1840.35,1285.38 U1.B8@1840.35,1302.95
  BOT w5: FEP1.B12@611.18,1070.87 650.55,1070.87 655.93,1065.49 655.93,1062.55 658.85,1059.62 685.42,1059.62 v1(696.67,1070.87)
OUT5_BOT_N: FEP1.A11 U1.R5 | length 2848.3
  TOP w5: v1(905,1040) 916.86,1051.86 1354.4,1051.86 1384,1051.86 cw(c1384,1046.86) 1389,1046.86 1389,1028.13 ccw(c1403,1028.13) 1417,1028.13 1417,1071 cw(c1422,1071) 1427,1071 1427,1019 ccw(c1441,1019) 1455,1019 1455,1071 cw(c1460,1071) 1465,1071 1465,1019 ccw(c1479,1019) 1493,1019 1493,1071 cw(c1498,1071) 1503,1071 1503,1019 ccw(c1517,1019) 1531,1019 1531,1071 cw(c1536,1071) 1541,1071 1541,1019 ccw(c1555,1019) 1569,1019 1569,1071 cw(c1574,1071) 1579,1071 1579,1019 ccw(c1593,1019) 1607,1019 1607,1046.86 cw(c1612,1046.86) 1612,1051.86 1619,1051.86 1641.86,1051.86 1644.88,1054.88 1649.8,1059.8 ccw(c1639.93,1069.73) 1649.8,1079.65 1629.97,1099.49 cw(c1633.51,1103.01) 1629.96,1106.53 ; 1630,1106.57 cw(c1633.51,1103.01) 1637.05,1106.55 ; 1637.07,1106.52 1673.78,1069.81 ccw(c1683.72,1079.68) 1693.62,1069.78 ccw(c1683.72,1079.68) 1693.6,1089.59 1656.84,1126.36 cw(c1660.38,1129.88) 1656.83,1133.4 ; 1656.87,1133.44 cw(c1660.38,1129.88) 1663.92,1133.42 1700.65,1096.68 ccw(c1710.59,1106.55) 1720.49,1096.65 ccw(c1710.59,1106.55) 1720.47,1116.46 1683.71,1153.23 cw(c1687.25,1156.75) 1683.7,1160.27 ; 1683.74,1160.31 cw(c1687.25,1156.75) 1690.79,1160.29 ; 1690.81,1160.26 1727.52,1123.55 ccw(c1737.46,1133.42) 1747.36,1123.52 ccw(c1737.46,1133.42) 1747.34,1143.33 ; 1743.89,1153.89 ccw(c1747.41,1150.34) 1743.89,1146.79 1747.33,1143.34 ; 1743.9,1153.9 1757.65,1167.65 ; 1757.67,1167.67 1762.61,1172.61 1763.45,1173.45 2487.43,1173.45 2490.35,1170.52 U1.R5@2490.35,1152.95
  BOT w5: FEP1.A11@784.41,1039.37 823.78,1039.37 829.15,1044.74 829.15,1047.69 832.08,1050.62 848.59,1050.62 849.82,1051.86 893.14,1051.86 v1(905,1040)
OUT5_BOT_P: FEP1.A12 U1.R6 | length 2848.3
  TOP w5: v1(905,1072.71) 916.85,1060.86 1354.4,1060.86 1384,1060.86 cw(c1384,1046.86) 1398,1046.86 1398,1028.13 ccw(c1403,1028.13) 1408,1028.13 1408,1071 cw(c1422,1071) 1436,1071 1436,1019 ccw(c1441,1019) 1446,1019 1446,1071 cw(c1460,1071) 1474,1071 1474,1019 ccw(c1479,1019) 1484,1019 1484,1071 cw(c1498,1071) 1512,1071 1512,1019 ccw(c1517,1019) 1522,1019 1522,1071 cw(c1536,1071) 1550,1071 1550,1019 ccw(c1555,1019) 1560,1019 1560,1071 cw(c1574,1071) 1588,1071 1588,1019 ccw(c1593,1019) 1598,1019 1598,1046.86 cw(c1612,1046.86) 1612,1060.86 1619,1060.86 1638.13,1060.86 1638.51,1061.24 1643.44,1066.17 ; 1643.44,1112.89 1680.19,1076.13 ccw(c1683.72,1079.68) 1687.23,1076.12 ; 1643.43,1112.9 ccw(c1633.51,1103.01) 1623.61,1112.91 ccw(c1633.51,1103.01) 1623.65,1093.08 1643.44,1073.29 cw(c1639.93,1069.73) 1643.47,1066.2 ; 1670.3,1139.76 ccw(c1660.38,1129.88) 1650.48,1139.78 ccw(c1660.38,1129.88) 1650.52,1119.95 1687.23,1083.24 cw(c1683.72,1079.68) 1687.27,1076.16 ; 1670.31,1139.76 1707.06,1103 ccw(c1710.59,1106.55) 1714.1,1102.99 ; 1714.1,1110.11 1677.39,1146.82 cw(c1687.25,1156.75) 1677.35,1166.65 cw(c1687.25,1156.75) 1697.17,1166.63 1733.93,1129.87 ccw(c1737.46,1133.42) 1740.97,1129.86 ; 1714.14,1103.03 ccw(c1710.59,1106.55) 1714.12,1110.08 ; 1741.01,1129.9 ccw(c1737.46,1133.42) 1740.99,1136.95 1737.54,1140.41 cw(c1747.41,1150.34) 1737.53,1160.26 1751.28,1174.01 ; 1751.31,1174.04 1756.25,1178.97 1759.72,1182.45 2487.43,1182.45 2490.35,1185.38 U1.R6@2490.35,1202.95
  BOT w5: FEP1.A12@784.41,1070.87 823.78,1070.87 829.15,1065.49 829.15,1062.55 832.08,1059.62 844.86,1059.62 846.1,1060.86 893.15,1060.86 v1(905,1072.71)
OUT5_TOP_N: FEP1.B8 U1.B5 | length 2854.5
  Sig1 w5: v1(678.98,945.68) 678.98,945.94 689.08,956.04 736.91,956.04 737,956.13 ccw(c737,970.13) 751,970.13 751,977.1 cw(c756,977.1) 761,977.1 761,935.16 ccw(c775,935.16) 789,935.16 789,951.13 cw(c794,951.13) 794,956.13 815.62,956.13 836.93,956.13 902.85,890.22 1205,890.22 1212,890.22 ccw(c1212,904.22) 1226,904.22 1226,943.25 cw(c1231,943.25) 1236,943.25 1236,873.22 ccw(c1250,873.22) 1264,873.22 1264,943.25 cw(c1269,943.25) 1274,943.25 1274,873.22 ccw(c1288,873.22) 1302,873.22 1302,943.25 cw(c1307,943.25) 1312,943.25 1312,873.22 ccw(c1326,873.22) 1340,873.22 1340,943.25 cw(c1345,943.25) 1350,943.25 1350,873.22 ccw(c1364,873.22) 1378,873.22 1378,943.25 cw(c1383,943.25) 1388,943.25 1388,873.22 ccw(c1402,873.22) 1416,873.22 1416,943.25 cw(c1421,943.25) 1426,943.25 1426,904.22 ccw(c1440,904.22) 1440,890.22 1468.92,890.22 1470.22,890.22 1572.5,992.5 1577.42,997.42 ccw(c1567.55,1007.35) 1577.43,1017.27 1562.59,1032.11 cw(c1566.14,1035.63) 1562.58,1039.15 ; 1562.62,1039.19 cw(c1566.14,1035.63) 1569.67,1039.17 1606.41,1002.44 ; 1589.45,1066.02 ccw(c1593.01,1062.5) 1589.46,1058.98 1626.21,1022.22 cw(c1616.34,1012.3) 1626.24,1002.4 cw(c1616.34,1012.3) 1606.41,1002.43 ; 1589.49,1066.06 cw(c1593.01,1062.5) 1596.54,1066.04 ; 1596.57,1066.01 1633.28,1029.31 ccw(c1643.21,1039.17) 1653.11,1029.27 ccw(c1643.21,1039.17) 1653.09,1049.08 ; 1616.32,1092.89 ccw(c1619.88,1089.37) 1616.33,1085.85 1653.08,1049.09 ; 1616.36,1092.93 cw(c1619.88,1089.37) 1623.41,1092.91 ; 1623.44,1092.88 1660.15,1056.18 ccw(c1670.08,1066.04) 1679.98,1056.14 ccw(c1670.08,1066.04) 1679.96,1075.95 ; 1643.19,1119.76 ccw(c1646.75,1116.24) 1643.2,1112.72 1679.95,1075.96 ; 1643.23,1119.8 cw(c1646.75,1116.24) 1650.28,1119.78 ; 1650.31,1119.75 1665.1,1104.96 ccw(c1675.03,1114.83) 1684.95,1104.95 1692.54,1112.54 ; 1692.56,1112.56 1697.5,1117.5 1753.45,1173.45 1837.43,1173.45 1840.35,1170.52 U1.B5@1840.35,1152.95
  BOT w5: FEP1.B8@611.18,944.88 650.55,944.88 655.93,950.26 655.93,953.2 658.85,956.13 668.27,956.13 678.72,945.68 v1(678.98,945.68)
OUT5_TOP_P: FEP1.B9 U1.B6 | length 2856.5
  Sig1 w5: v1(678.46,976.17) 678.72,976.17 678.72,973.83 687.51,965.04 733.18,965.04 733.27,965.13 737,965.13 ccw(c737,970.13) 742,970.13 742,977.1 cw(c756,977.1) 770,977.1 770,935.16 ccw(c775,935.16) 780,935.16 780,951.13 cw(c794,951.13) 794,965.13 815.62,965.13 840.66,965.13 906.58,899.22 1205,899.22 1212,899.22 ccw(c1212,904.22) 1217,904.22 1217,943.25 cw(c1231,943.25) 1245,943.25 1245,873.22 ccw(c1250,873.22) 1255,873.22 1255,943.25 cw(c1269,943.25) 1283,943.25 1283,873.22 ccw(c1288,873.22) 1293,873.22 1293,943.25 cw(c1307,943.25) 1321,943.25 1321,873.22 ccw(c1326,873.22) 1331,873.22 1331,943.25 cw(c1345,943.25) 1359,943.25 1359,873.22 ccw(c1364,873.22) 1369,873.22 1369,943.25 cw(c1383,943.25) 1397,943.25 1397,873.22 ccw(c1402,873.22) 1407,873.22 1407,943.25 cw(c1421,943.25) 1435,943.25 1435,904.22 ccw(c1440,904.22) 1440,899.22 1466.49,899.22 1468.92,901.65 1566.14,998.86 1571.06,1003.79 ; 1571.09,1003.82 ccw(c1567.55,1007.35) 1571.07,1010.9 1556.27,1025.7 cw(c1566.14,1035.63) 1556.24,1045.53 cw(c1566.14,1035.63) 1576.05,1045.52 ; 1576.06,1045.51 1612.81,1008.75 ccw(c1616.34,1012.3) 1619.86,1008.74 ccw(c1616.34,1012.3) 1619.88,1015.83 ; 1619.85,1015.86 1583.14,1052.57 cw(c1593.01,1062.5) 1583.11,1072.4 cw(c1593.01,1062.5) 1602.92,1072.39 1639.68,1035.62 ccw(c1643.21,1039.17) 1646.73,1035.61 ; 1646.77,1035.65 ccw(c1643.21,1039.17) 1646.75,1042.7 1610.01,1079.44 cw(c1619.88,1089.37) 1609.98,1099.27 cw(c1619.88,1089.37) 1629.79,1099.26 1666.55,1062.49 ccw(c1670.08,1066.04) 1673.6,1062.48 ; 1673.59,1069.6 1636.88,1106.31 cw(c1646.75,1116.24) 1636.85,1126.14 cw(c1646.75,1116.24) 1656.66,1126.13 1671.47,1111.32 ccw(c1675.03,1114.83) 1678.58,1111.31 1686.17,1118.9 1691.14,1123.86 1749.72,1182.45 1837.43,1182.45 1840.35,1185.38 U1.B6@1840.35,1202.95 ; 1673.64,1062.52 ccw(c1670.08,1066.04) 1673.62,1069.57
  BOT w5: FEP1.B9@611.18,976.38 650.55,976.38 655.93,971 655.93,968.06 658.85,965.13 667.68,965.13 678.46,975.91 v1(678.46,976.17)
OUT6_BOT_N: FEP1.A8 U1.R3 | length 2852.1
  TOP w5: v1(910.97,945.11) 910.97,945.43 921.3,955.76 937.5,955.76 944.5,955.76 ccw(c944.5,969.76) 958.5,969.76 958.5,999.59 cw(c963.5,999.59) 968.5,999.59 968.5,928.73 ccw(c982.5,928.73) 996.5,928.73 996.5,950.76 cw(c1001.5,950.76) 1001.5,955.76 1020.52,955.76 1181.15,955.76 1213.27,923.64 1254.59,923.64 1261.59,923.64 ccw(c1261.59,937.64) 1275.59,937.64 1275.59,956.31 cw(c1280.59,956.31) 1285.59,956.31 1285.59,920.64 ccw(c1299.59,920.64) 1313.59,920.64 1313.59,956.31 cw(c1318.59,956.31) 1323.59,956.31 1323.59,925.23 ccw(c1337.59,925.23) 1351.59,925.23 1351.59,937.64 cw(c1356.59,937.64) 1361.59,937.64 ccw(c1375.59,937.64) 1375.59,923.64 1406.32,923.64 1442,923.64 1449,923.64 ccw(c1449,937.64) 1463,937.64 1463,958.64 cw(c1468,958.64) 1473,958.64 1473,906.64 ccw(c1487,906.64) 1501,906.64 1501,958.64 cw(c1506,958.64) 1511,958.64 1511,906.64 ccw(c1525,906.64) 1539,906.64 1539,958.64 cw(c1544,958.64) 1549,958.64 1549,937.64 ccw(c1563,937.64) 1563,923.64 1584.65,923.64 1610.19,923.64 1620.93,934.38 1625.86,939.32 ; 1625.89,939.34 1635.34,948.8 cw(c1638.9,945.29) 1642.46,948.8 ; 1642.46,948.8 1666.33,924.93 ccw(c1676.26,934.8) 1686.16,924.9 ccw(c1676.26,934.8) 1686.15,944.71 1645.31,985.55 cw(c1648.85,989.08) 1645.3,992.59 ; 1645.34,992.63 cw(c1648.85,989.08) 1652.39,992.61 ; 1652.41,992.59 1693.2,951.8 ccw(c1703.13,961.67) 1713.03,951.77 ccw(c1703.13,961.67) 1713.02,971.58 ; 1672.17,1019.46 ccw(c1675.72,1015.95) 1672.18,1012.42 1713.01,971.59 ; 1672.21,1019.5 cw(c1675.72,1015.95) 1679.26,1019.48 1720.07,978.67 ccw(c1730,988.54) 1739.9,978.64 ccw(c1730,988.54) 1739.89,998.45 1716,1022.34 ; 1715.99,1022.35 cw(c1719.51,1025.9) 1715.97,1029.42 ; 1716,1029.46 1720.93,1034.38 1760,1073.45 2487.43,1073.45 2490.35,1070.52 U1.R3@2490.35,1052.95
  BOT w5: FEP1.A8@780.68,944.88 FEP1.A8@784.41,944.88 823.78,944.88 829.15,950.26 829.15,953.2 832.08,956.13 842.84,956.13 843.22,955.76 900.01,955.76 910.65,945.11 v1(910.97,945.11)
OUT6_BOT_P: FEP1.A9 U1.R4 | length 2848.3
  TOP w5: v1(910.34,975.4) 910.65,975.4 921.3,964.76 937.5,964.76 944.5,964.76 ccw(c944.5,969.76) 949.5,969.76 949.5,999.59 cw(c963.5,999.59) 977.5,999.59 977.5,928.73 ccw(c982.5,928.73) 987.5,928.73 987.5,950.76 cw(c1001.5,950.76) 1001.5,964.76 1020.52,964.76 1184.88,964.76 1217,932.64 1254.59,932.64 1261.59,932.64 ccw(c1261.59,937.64) 1266.59,937.64 1266.59,956.31 cw(c1280.59,956.31) 1294.59,956.31 1294.59,920.64 ccw(c1299.59,920.64) 1304.59,920.64 1304.59,956.31 cw(c1318.59,956.31) 1332.59,956.31 1332.59,925.23 ccw(c1337.59,925.23) 1342.59,925.23 1342.59,937.64 cw(c1356.59,937.64) 1370.59,937.64 ccw(c1375.59,937.64) 1375.59,932.64 1406.32,932.64 1442,932.64 1449,932.64 ccw(c1449,937.64) 1454,937.64 1454,958.64 cw(c1468,958.64) 1482,958.64 1482,906.64 ccw(c1487,906.64) 1492,906.64 1492,958.64 cw(c1506,958.64) 1520,958.64 1520,906.64 ccw(c1525,906.64) 1530,906.64 1530,958.64 cw(c1544,958.64) 1558,958.64 1558,937.64 ccw(c1563,937.64) 1563,932.64 1584.65,932.64 1606.46,932.64 1614.56,940.74 1619.5,945.68 ; 1619.53,945.71 1628.98,955.16 cw(c1638.9,945.29) 1648.83,955.16 1672.74,931.25 ccw(c1676.26,934.8) 1679.78,931.24 ; 1679.8,938.33 cw(c1676.26,934.8) 1679.82,931.28 ; 1679.77,938.36 1638.99,979.14 cw(c1648.85,989.08) 1638.95,998.98 cw(c1648.85,989.08) 1658.77,998.96 1699.61,958.12 ccw(c1703.13,961.67) 1706.65,958.11 ; 1706.64,965.23 1665.86,1006.01 cw(c1675.72,1015.95) 1665.82,1025.85 cw(c1675.72,1015.95) 1685.64,1025.83 1726.48,984.99 ccw(c1730,988.54) 1733.52,984.98 ; 1706.69,958.15 ccw(c1703.13,961.67) 1706.67,965.2 ; 1733.54,992.07 cw(c1730,988.54) 1733.56,985.02 ; 1733.51,992.1 1709.64,1015.97 cw(c1719.51,1025.9) 1709.64,1035.82 1714.56,1040.74 1756.27,1082.45 2487.43,1082.45 2490.35,1085.38 U1.R4@2490.35,1102.95
  BOT w5: FEP1.A9@784.41,976.38 823.78,976.38 829.15,971 829.15,968.06 832.08,965.13 846.57,965.13 846.95,964.76 900.01,964.76 910.34,975.08 v1(910.34,975.4)